# Altium PCB dc_cdi_cx500.PcbDoc (part 2 of 2)
Units mm, origin at the board's own origin, x right, y up, seen from the top; angles counter-clockwise.
Board outline 71.37 x 84.84 mm, 4 copper layers (Top, Power Plane, Ground Plane, Bottom), stack 1.586 mm thick; 162 components, 101 nets, 486 pads, 355 vias.
Unrouted connection lines stored in the file: 55.
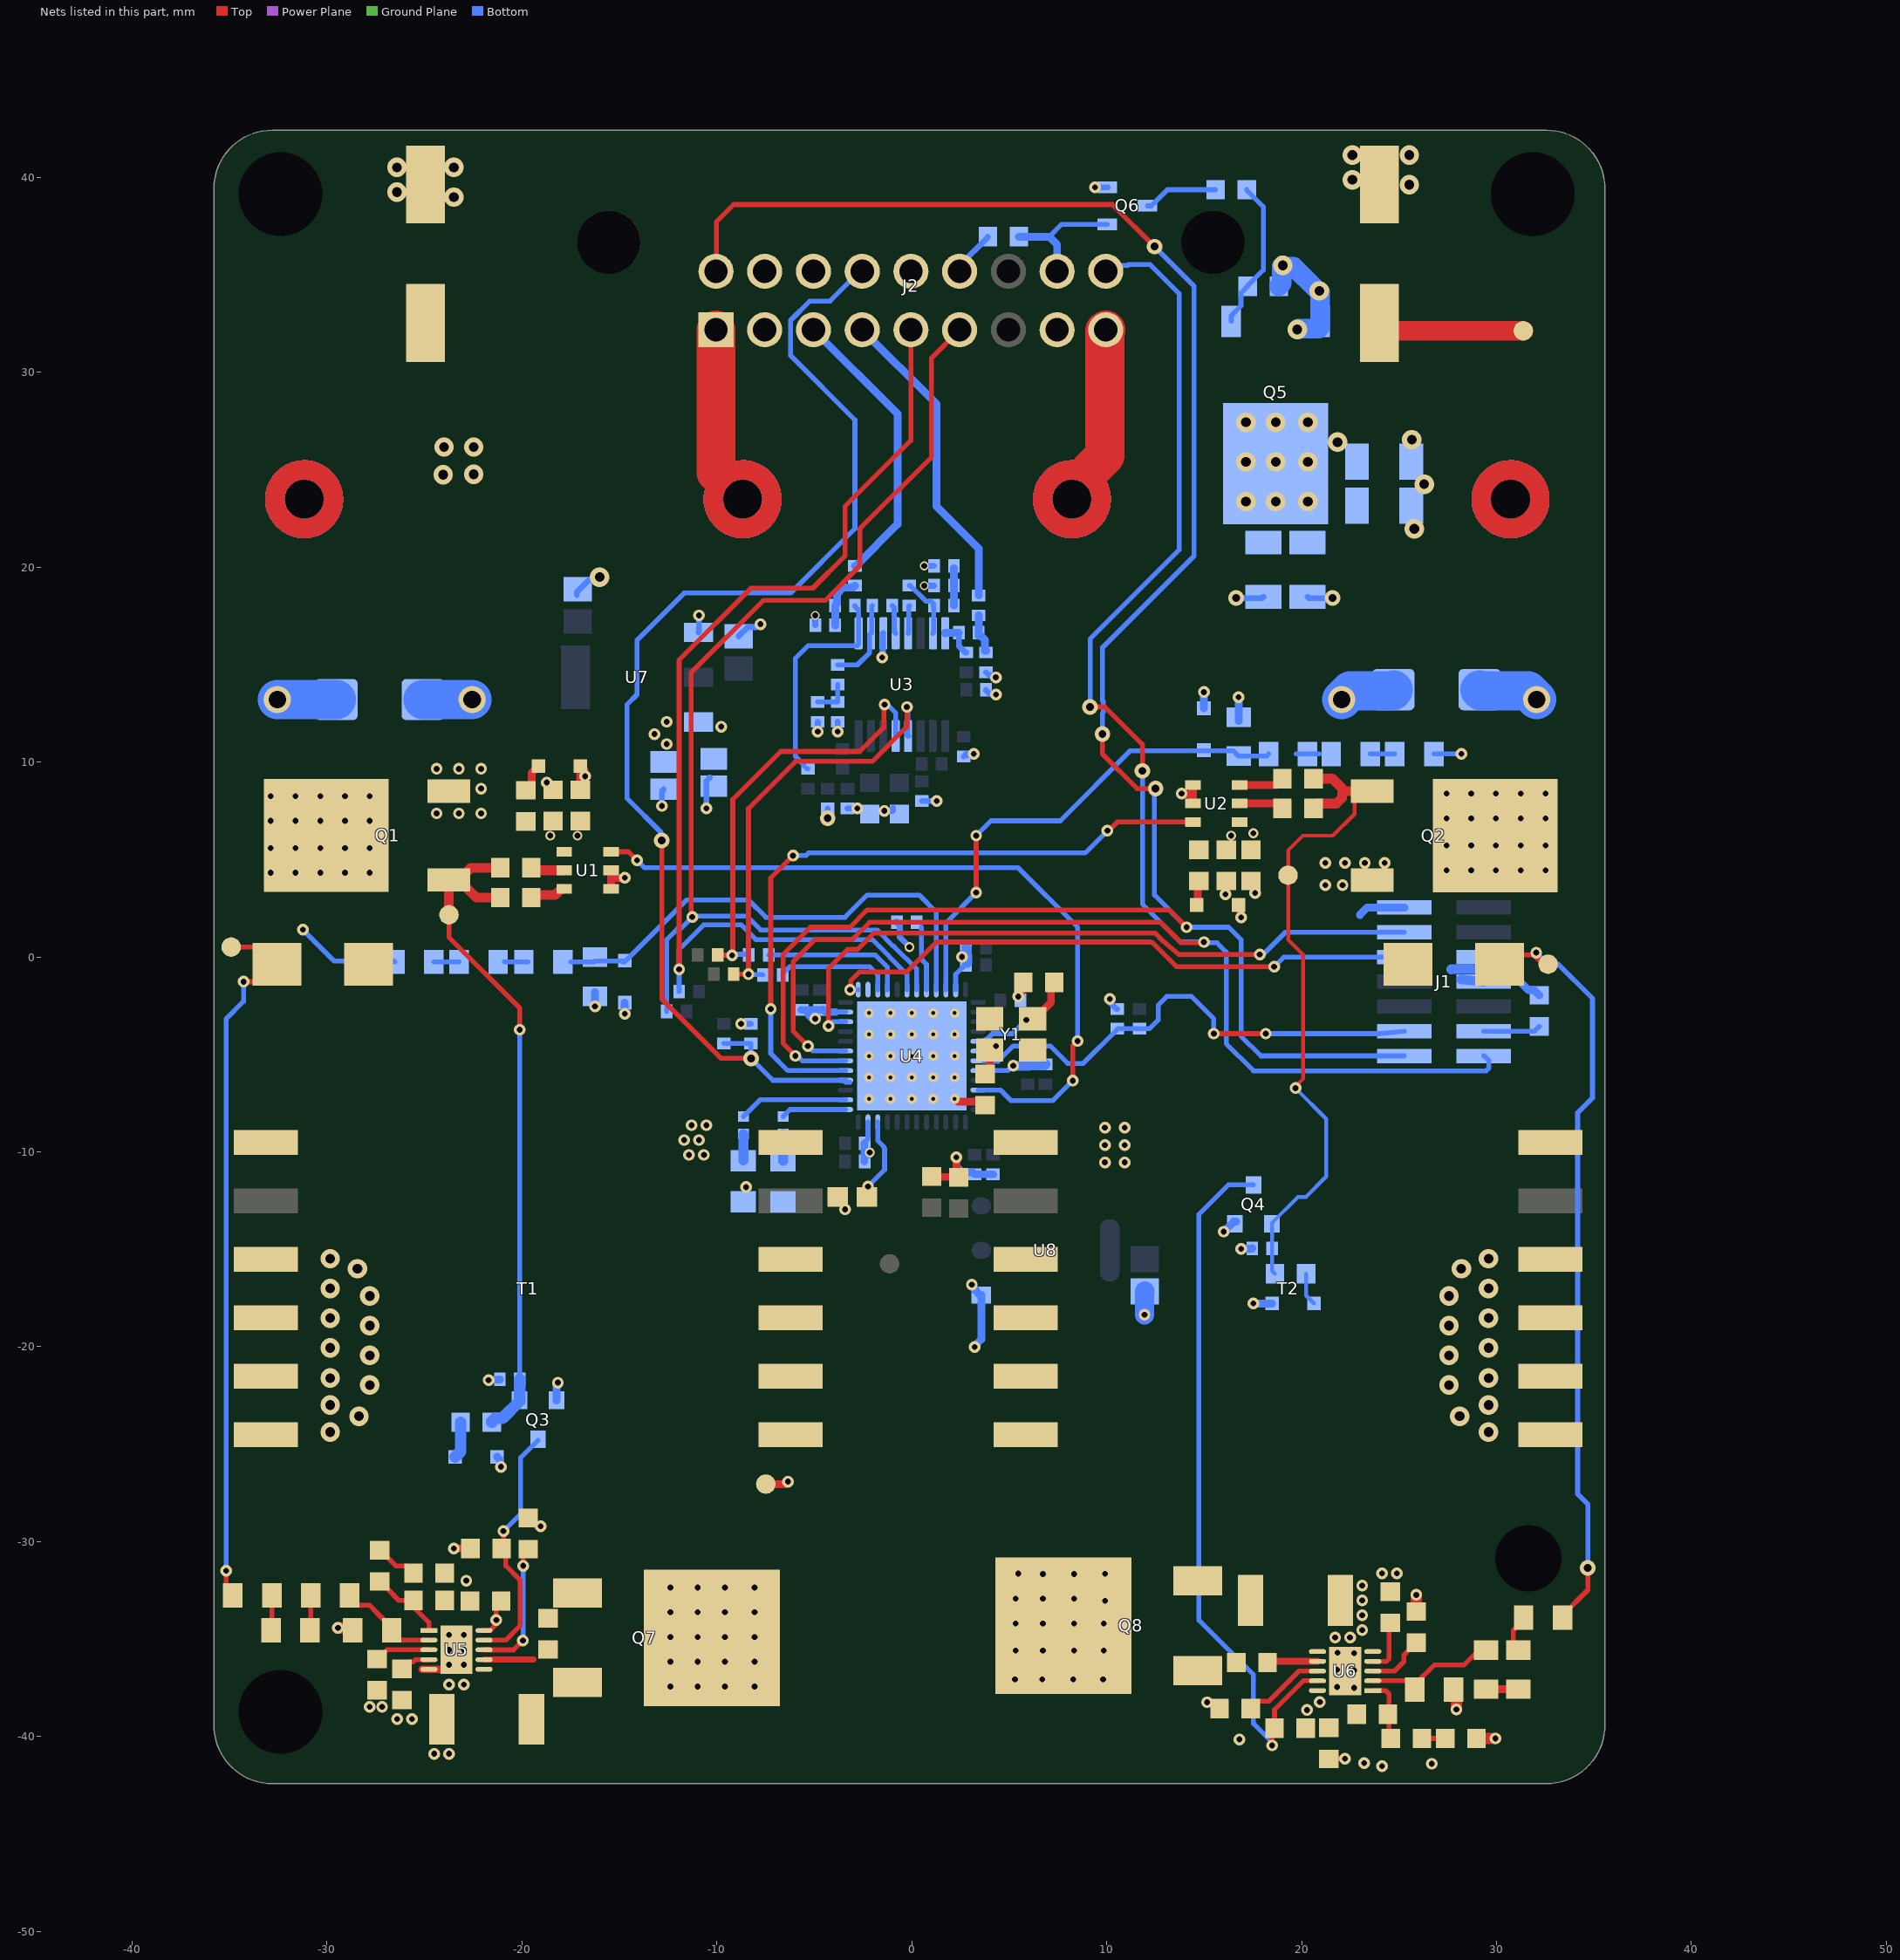
[diagram p4: the nets of this part, all layers, seen from the top]

## Via types
v1: diameter 0.6, hole 0.3, Top to Bottom, 251 vias
v2: diameter 1, hole 0.5, Top to Bottom, 57 vias
v3: diameter 0.5, hole 0.2, Top to Bottom, 25 vias
v4: diameter 0.8, hole 0.4, Top to Bottom, 11 vias
v5: diameter 0.5, hole 0.3, Top to Bottom, 7 vias
v6: diameter 0.45, hole 0.3, Top to Bottom, 3 vias
v7: diameter 0.55, hole 0.3, Top to Bottom, 1 vias

## Nets (pads, with @x,y where several pads share a name; then routed paths per layer and width w, separated by ;. In a path a pad name is that pad's centre, name@x,y a point inside that pad or via, vN(x,y) a via of type N, cw(c..) or ccw(c..) an arc to the next point about the centre after c; other vN are vias at no path point) (continued)
DGND: C22.1 C23.2 C24.2 C25.2 C26.2 C27.2 C28.2 C29.2 C30.2 C31.2 C32.2 C33.2 C34.2 C49.1 C50.2 C51.2 C54.2 C55.2 D3.1 D4.1 D9.2 D10.2 J1.2 J1.5 J1.7 pad.4@-7.493,-27.051 Q3.2 Q4.2 R7.2 R8.2 R29.2 R35.1 R39.2 RJ1.2 U4.8 U4.23 U4.35 U4.47 U4.49 U8.1 Y1.2 Y1.4 | length 41.8
  Top w0.4: pad.4@-7.493,-27.051 -6.531,-27.051 -6.404,-26.924 v1(-6.35,-26.924) ; C23.2@-3.798,-12.319 -3.473,-12.619 v1(-3.429,-12.954) ; C51.2@1.016,-11.265 1.039,-11.288 2.381,-11.288 C50.2@2.404,-11.311 2.286,-11.193 v1(2.286,-10.287) ; v3(2.2,-7.28) 2.227,-7.28 2.376,-7.429 C34.2@3.763,-7.429 ; Y1.4@3.996,-3.178 Y1.4@4.096,-3.178 ; v1(5.461,-2.032) ccw(c5.239,-1.699) 5.63,-1.781 cw(c6.556,-1.97) 5.719,-1.532 C33.2@5.887,-1.303
  Top w0.5: v1(5.201,-5.579) v1@5.22,-5.56 ; Y1.2@6.096,-4.778 Y1.2@6.196,-4.778
  Bottom w0.25: -3.91,-2.83 U4.35@-3.4,-2.83 ; C32.2@-2.46,-9.559 -2.265,-9.364 -2.265,-9.14 -2.234,-9.11 ; C32.2@-2.438,-9.585 C32.2@-2.412,-9.559 ; C31.2@-2.412,-10.494 C31.2@-2.386,-10.468 ; -2.25,-9.094 U4.23@-2.25,-8.48 ; U4.47@2.25,-1.68 2.25,-0.894 C28.2@2.843,-0.301 ; v1(2.575,0) 2.609,0.034 C29.2@2.609,0.263 ; U4.8@3.4,-5.83 4.846,-5.83 ccw(c4.846,-5.58) 5.023,-5.757 v1(5.201,-5.579)
  Bottom w0.3: v1(-8.763,-3.429) C54.2@-8.255,-3.429 ; R39.2@-0.799,1.815 -0.799,1.765 -0.612,1.578 -0.612,1.013 -0.127,0.528 v5(-0.127,0.508) ; v1(10.16,-2.159) 10.217,-2.216 10.217,-2.393 10.491,-2.667 C55.2@10.541,-2.667
  Bottom w0.4: v1(-21.717,-21.717) -21.696,-21.696 -21.158,-21.696 R7.2@-21.136,-21.674 ; D9.2@-21.277,-25.654 -21.127,-25.804 -21.127,-26.063 -21.082,-26.108 v1(-21.082,-26.162) ; Q3.2@-18.227,-22.749 -18.227,-21.91 v1(-18.161,-21.844) ; C25.2@-5.68,-2.717 C26.2@-4.713,-2.717 ; C26.2@-4.559,-2.71 -4.539,-2.71 -4.419,-2.83 -3.91,-2.83 ; C31.2@-2.438,-10.487 C32.2@-2.438,-9.585 ; v1(2.286,-10.287) 2.286,-10.74 2.602,-11.056 3.124,-11.056 C22.1@3.224,-11.156 R35.1@4.166,-11.156 ; v1(3.079,-16.822) 3.079,-16.876 3.261,-17.057 3.261,-17.112 U8.1@3.497,-17.348 ; v1(3.224,-20.018) 3.224,-19.964 3.563,-19.624 3.563,-17.414 U8.1@3.497,-17.348 ; U8.1@3.563,-17.348 U8.1@3.497,-17.348 ; v1(16.002,-14.097) 16.512,-13.587 Q4.2@16.64,-13.587 ; v1(16.891,-14.986) 16.905,-14.972 17.452,-14.972 R8.2@17.467,-14.957 ; v1(17.526,-17.78) D10.2@18.483,-17.78 ; 22.987,2.159 23.368,2.54 J1.2@25.27,2.54 ; J1.7@29.34,-1.27 31.203,-1.27 31.626,-1.693 31.92,-1.693 R29.2@32.195,-1.968
  Bottom w0.5: v5@-2.384,-10.09 -2.216,-10.09 v5(-2.159,-10.033) ; C29.2@2.784,0.488 2.834,0.438 2.834,0.071 2.843,0.061 C28.2@2.843,-0.301 ; v1@5.233,-5.592 6.008,-5.592 6.033,-5.567 6.808,-5.567 C27.2@6.858,-5.517 ; 27.686,-0.635 28.844,-0.628 ccw(c28.841,-0.128) 29.341,-0.126 29.341,-0.12 J1.5@29.34,0 ; J1.7@28.195,-1.15 J1.7@29.34,-1.27
  Bottom w0.6: -5.222,-2.908 v1(-4.958,-3.172)
  Bottom w1: v1(11.938,-18.36) 11.938,-17.174 C49.1@11.955,-17.157
  other v1: 16.807,-40.15 -8.509,-11.811
  other v3: -2.2,-7.28 -1.1,-7.28 0,-7.28 1.1,-7.28 -2.2,-6.18 -1.1,-6.18 0,-6.18 1.1,-6.18 2.2,-6.18 -2.2,-5.08 -1.1,-5.08 0,-5.08 1.1,-5.08 2.2,-5.08 -2.2,-3.98 -1.1,-3.98 0,-3.98 1.1,-3.98 2.2,-3.98 -2.2,-2.88 -1.1,-2.88 0,-2.88 1.1,-2.88 2.2,-2.88
EXT_SENSOR1_I2C_SCL: J2.5 R36.2 U4.42 | length 55.8
  Top w0.25: v1(-11.938,-0.635) -11.938,15.24 -8.255,18.923 -5.08,18.923 -3.429,20.574 -3.429,23.114 -0.047,26.496 J2.5@-0.047,32.179
  Bottom w0.25: R36.2@-11.938,-1.778 v1(-11.938,-0.635) -11.938,0.381 -10.668,1.651 -8.763,1.651 -8.001,0.889 -2.028,0.889 -0.25,-0.889 U4.42@-0.25,-1.68
EXT_SENSOR1_I2C_SDA: J2.6 R34.2 U4.43 | length 57
  Top w0.25: v1(-11.264,2.047) -11.328,2.111 -11.328,14.58 -7.62,18.288 -4.445,18.288 -2.667,20.066 -2.667,21.971 1.016,25.654 1.016,30.742 J2.6@2.453,32.179
  Bottom w0.25: R34.2@-12.573,-2.794 -12.573,0.889 -12.027,1.435 -11.877,1.435 v1(-11.264,2.047) ; v1@-11.339,2.123 -11.318,2.101 -8.481,2.101 -7.762,1.382 -1.782,1.382 -0.944,0.544 -0.925,0.544 0.25,-0.631 U4.43@0.25,-1.68
EXT_SENSOR3_SPI_NSS: U4.38
FLYBACK_EN_L: Q3.3 R43.1 U5.9 | length 12.8
  Top w0.25: U5.9@-21.949,-35.055 -20.831,-35.055 -20.104,-34.328 -20.104,-31.966 -20.828,-31.242 -20.828,-30.569 R43.1@-21.044,-30.353 -20.955,-29.978 v1(-20.955,-29.464)
  Bottom w0.25: v1(-20.955,-29.464) -20.066,-28.575 -20.066,-25.688 Q3.3@-19.177,-24.799
FLYBACK_EN_R: Q4.3 R56.2 U6.9 | length 36.9
  Top w0.25: v1(18.489,-40.458) 18.489,-39.701 R56.2@18.608,-39.582 18.608,-38.625 20.088,-37.145 U6.9@20.818,-37.145
  Bottom w0.25: Q4.3@17.526,-11.7 16.24,-11.7 14.732,-13.208 14.732,-34.036 17.526,-36.83 17.526,-39.342 18.422,-40.237 18.422,-40.391 v1(18.489,-40.458)
GND: C7.2 C8.2 C9.2 C10.2 C11.2 C12.2 C13.2 C14.2 C15.2 C16.1 C17.1 C18.2 C19.2 C20.2 C21.2 C47.2 C48.2 C52.2 C53.2 J2.2 J2.8 J2.14 J2.15 NT1.2 NT2.2 NT3.2 NT4.2 Q6.2 R10.2 R25.2 R26.2 R27.2 R32.1 RJ1.1 U3.11 U7.1 | length 20.3
  Bottom w0.3: C53.2@-17.192,18.577 -17.192,18.712 -16.567,19.337 -16.356,19.337 -16.206,19.487 v2(-16.017,19.487) ; v1(-12.827,7.747) -12.827,8.502 C48.2@-12.728,8.601 ; U7.1@-10.947,16.65 -10.922,16.675 v1(-10.922,17.526) ; v1(-10.541,7.62) -10.541,9.034 C47.2@-10.369,9.205 ; C52.2@-8.89,16.447 -8.413,16.924 -7.993,16.924 -7.843,17.074 v1(-7.762,17.074) ; C15.2@-4.953,17.018 v6(-4.953,17.526) ; v1(-4.826,11.557) R27.2@-4.826,12.065 ; v4(-4.318,7.112) C13.2@-4.318,7.62 ; v1(-3.81,11.557) C14.2@-3.81,12.065 ; R26.2@-3.302,7.62 v1(-2.794,7.62) ; v1(-1.524,15.367) -1.492,15.399 -1.492,16.593 U3.11@-1.46,16.625 ; v1(-1.407,7.496) -0.985,7.496 -0.96,7.521 C10.2@-0.96,7.653 ; R25.2@0.508,8.001 v1(1.27,8.001) ; v6(0.635,19.05) R10.2@1.143,19.05 ; v6(0.635,20.066) C9.2@1.143,20.066 ; J2.15@2.453,35.179 2.453,35.486 3.899,36.932 R32.1@3.899,36.957 ; C8.2@2.667,10.287 2.817,10.437 2.817,10.407 2.867,10.357 3.118,10.357 v1(3.175,10.414) ; C11.2@3.81,13.716 3.81,13.669 3.96,13.519 4.261,13.519 v1(4.318,13.462) ; C7.2@3.81,14.605 3.96,14.455 4.119,14.455 4.23,14.344 v1(4.311,14.344) ; v1(9.398,39.497) 9.401,39.494 10.031,39.494 Q6.2@10.033,39.492 ; v4(16.637,18.415) 17.981,18.415 C20.2@18.047,18.481 ; C21.2@20.307,18.481 20.372,18.415 v4(21.59,18.415)
  other v2: 25.781,21.971 26.289,24.257 25.654,26.543 -23.495,38.989 -26.416,39.243 25.527,39.624 22.606,39.878 -26.416,40.513 -23.495,40.513 22.606,41.148 25.527,41.148
HSE_OSC_IN: C33.1 U4.5 Y1.3 | length 5.3
  Top w0.25: Y1.3@6.196,-3.178 Y1.3@6.296,-3.178
  Top w0.4: Y1.3@6.296,-3.178 7.139,-2.335 C33.1@7.139,-1.303
  Bottom w0.25: U4.5@3.4,-4.33 3.675,-4.33 3.775,-4.23 3.847,-4.23 4.14,-3.937 5.165,-3.937 v1(5.873,-3.229)
HSE_OSC_OUT: C34.1 U4.6 Y1.1 | length 2.4
  Top w0.25: C34.1@3.763,-6.003 C34.1@3.996,-5.77
  Top w0.35: C34.1@3.996,-5.77 Y1.1@3.996,-4.778
  Bottom w0.25: U4.6@3.4,-4.83 4.136,-4.83 4.264,-4.702 ccw(c4.134,-4.572) v1(4.318,-4.572)
IGNT_TRIG_L: U1.6 U4.10 | length 39
  Top w0.25: U1.6@-15.437,5.395 -14.54,5.395 -14.098,4.953 v1(-14.097,4.953) ; v1(8.255,-6.35) 8.255,-4.572 v1(8.509,-4.318)
  Bottom w0.25: v1(-14.097,4.953) -13.716,4.572 5.461,4.572 8.509,1.524 v1(8.509,-4.318) ; U4.10@3.4,-6.83 4.544,-6.83 5.08,-7.366 7.239,-7.366 v1(8.255,-6.35)
IGNT_TRIG_R: U2.6 U4.29 | length 36.1
  Top w0.25: v1(-7.239,-2.667) -7.239,4.054 v1(-6.096,5.197) ; v1(10.033,6.477) 10.094,6.477 10.541,6.924 U2.6@14.421,6.924
  Bottom w0.25: v1(-7.239,-2.667) -7.239,-4.953 -6.362,-5.83 U4.29@-3.4,-5.83 ; v1(-6.096,5.197) -6.084,5.209 -5.421,5.209 -5.296,5.334 8.89,5.334 v1(10.033,6.477)
IN1+: R12.2 R20.2 U3.16 | length 1.9
  Bottom w0.3: R12.2@2.413,16.637 2.413,15.952 2.744,15.621 R20.2@2.794,15.621
  Bottom w0.4: U3.16@1.714,16.605 1.714,16.632 1.72,16.637 R12.2@2.413,16.637
IN1-: R16.2 R19.2 U3.15 | length 3.1
  Bottom w0.25: U3.15@1.079,16.605 1.111,16.637 R16.2@1.111,18.002
  Bottom w0.254: R19.2@-0.127,19.05 -0.077,19.05 0.716,18.257 0.97,18.257 1.111,18.116 R16.2@1.111,18.002
IN2+: R18.2 R23.2 U3.9 | length 11.6
  Bottom w0.25: R18.2@-5.334,9.652 -5.384,9.652 -5.559,9.827 -5.559,9.877 -5.969,10.287 -5.969,15.326 -5.334,15.961 -2.81,15.961 -2.73,16.041 U3.9@-2.73,16.605 -2.73,17.793 -2.921,17.984 R23.2@-2.921,18.034
IN2-: R17.2 R24.2 U3.10 | length 4.4
  Bottom w0.254: R24.2@-3.81,14.986 -2.794,14.986 -2.174,15.606 -2.174,16.527 U3.10@-2.095,16.605 -2.06,16.641 -2.06,17.992 R17.2@-2.024,18.028
KILL_SWITCH: C54.1 J2.13 R68.1 U4.28 | length 63.2
  Top w0.25: v4(-12.827,5.969) -12.827,-2.159 -9.779,-5.207 v4(-8.255,-5.207)
  Bottom w0.25: v4(-12.827,5.969) -12.867,6.009 -12.867,6.39 -14.605,8.128 -14.605,12.954 -14.097,13.462 -14.097,16.256 -11.684,18.669 -6.223,18.669 -2.921,21.971 -2.921,27.559 -6.222,30.86 -6.222,32.666 -5.233,33.655 -4.191,33.655 -2.667,35.179 J2.13@-2.547,35.179 ; R68.1@-9.652,-4.445 C54.1@-8.255,-4.445 v4(-8.255,-5.207) -7.132,-6.33 U4.28@-3.4,-6.33 ; U4.28@-3.4,-6.43 U4.28@-3.175,-6.43
L_COIL: C1.1 J2.1 | length 9.3
  Top w2: J2.1@-10.047,32.179 -10.047,24.853 C1.1@-8.679,23.485
L_COIL_MOSFET_GATE: pad.5@-23.749,2.159 Q1.1 Q3.1 R2.1 R3.1 R7.1 R66.1 | length 34.9
  Top w0.254: pad.5@-23.749,2.413 -23.749,1.016 -20.12,-2.613 v1@-20.12,-3.61
  Top w0.5: pad.5@-23.749,2.413 Q1.1@-23.749,3.949 ; R3.1@-21.12,3.048 -22.348,3.048 -23.249,3.949 -22.626,4.572 R2.1@-21.12,4.572
  Bottom w0.254: R7.1@-20.12,-21.674 v1(-20.12,-3.737)
  Bottom w0.6: R66.1@-21.552,-23.876 -21.552,-23.851 -21.377,-23.676 -21.004,-23.676 -20.127,-22.799 Q3.1@-20.127,-22.749 -20.127,-21.731 -20.12,-21.724 R7.1@-20.12,-21.674
L_HV: C1.2 C37.2 D5.1 D11.1 pad.4@-34.925,0.508 Q1.4 R40.2 R41.2 | length 45.5
  Top w0.254: v1(-35.179,-31.496) -35.179,-32.268 -34.928,-32.268 -34.557,-32.639 R40.2@-34.464,-32.639 ; pad.4@-34.925,0.508 -33.465,0.508 D5.1@-32.576,-0.381 -33.465,-1.27 v1(-34.29,-1.27)
  Bottom w0.254: v1(-35.179,-31.496) -35.179,-3.175 -34.29,-2.286 v1(-34.29,-1.27) ; v1(-31.242,1.397) -29.637,-0.208 -26.573,-0.208 R41.2@-26.527,-0.254
  Bottom w2: C37.2@-32.559,13.208 D11.1@-29.52,13.208
  other v1: -32.893,4.318 -31.623,4.318 -30.353,4.318 -29.083,4.318 -27.813,4.318 -32.893,5.588 -31.623,5.588 -30.353,5.588 -29.083,5.588 -27.813,5.588 -32.893,6.985 -31.623,6.985 -30.353,6.985 -29.083,6.985 -27.813,6.985 -32.893,8.255 -31.623,8.255 -30.353,8.255 -29.083,8.255 -27.813,8.255
L_HV_FB: R46.1 R50.2 U5.2 | length 5.1
  Top w0.25: R46.1@-28.845,-32.766 -28.845,-32.891 -28.47,-33.266 -28.345,-33.266 -28.337,-33.274 -27.813,-33.274 -27.437,-33.65 -27.437,-33.668 -26.686,-34.419 R50.2@-26.686,-34.544 ; R50.2@-26.686,-34.669 -26.3,-35.055 U5.2@-24.78,-35.055
LED1: R38.1 U4.25 | length 3.4
  Bottom w0.254: R38.1@-6.604,-8.186 -6.248,-7.83 U4.25@-3.4,-7.83
LED2: R37.1 U4.26 | length 5.6
  Bottom w0.254: R37.1@-8.636,-8.186 -7.78,-7.33 U4.26@-3.4,-7.33
LEFT_PULSE_3V3: R13.1 U4.39 | length 6
  Bottom w0.25: R13.1@-6.627,-0.92 -6.627,-0.87 -6.266,-0.508 -2.159,-0.508 -1.75,-0.917 U4.39@-1.75,-1.68
LEFT_PULSE_P: J2.4 R9.2 | length 16.1
  Bottom w0.4: J2.4@-2.547,32.179 1.27,28.362 1.27,23.114 3.429,20.955 R9.2@3.429,18.542
NetC23_1: C23.1 U4.22 | length 4.5
  Top w0.25: v1(-2.251,-11.776) -2.251,-11.782 -2.413,-11.944 C23.1@-2.181,-12.319
  Bottom w0.25: v1(-2.251,-11.776) -1.397,-10.922 -1.397,-9.883 ccw(c-1.647,-9.883) -1.47,-9.706 -1.75,-9.426 U4.22@-1.75,-8.48
NetC35_2: C35.2 U5.8 | length 7
  Top w0.254: U5.8@-21.949,-35.555 -21.946,-35.557 -20.438,-35.557 v1(-19.955,-35.075) ; v1(-19.939,-31.242) -19.939,-30.645 C35.2@-19.685,-30.391
  Bottom w0.254: v1@-19.947,-35.067 -19.947,-31.25 v1(-19.939,-31.242)
NetC38_2: C38.2 U5.3 | length 2.8
  Top w0.25: C38.2@-27.432,-36.03 -27.407,-36.03 -26.932,-35.555 U5.3@-24.78,-35.555
NetC39_2: C39.2 R52.2 U5.1 | length 4
  Top w0.254: R52.2@-27.305,-32.042 -27.28,-32.042 -26.573,-32.749 -26.573,-32.774 -26.327,-33.02 C39.2@-25.565,-33.02 ; C39.2@-25.819,-33.109 -24.78,-34.148 U5.1@-24.78,-34.555
NetC40_2: C40.2 R52.1 | length 2.2
  Top w0.25: R52.1@-27.305,-30.442 -27.28,-30.442 -26.474,-31.248 -25.915,-31.248 -25.565,-31.598 C40.2@-25.565,-31.623
NetC41_2: C41.2 U6.8 | length 4.2
  Top w0.25: C41.2@17.386,-38.564 17.386,-38.539 17.736,-38.189 18.326,-38.189 19.87,-36.645 U6.8@20.818,-36.645
NetC44_1: C44.1 U6.3 | length 3.1
  Top w0.25: U6.3@23.649,-36.645 24.767,-36.645 25.246,-36.166 25.246,-35.823 25.506,-35.563 25.506,-35.538 25.856,-35.188 C44.1@25.881,-35.188
NetC45_1: C45.1 R65.1 U6.1 | length 3.2
  Top w0.254: U6.1@23.649,-37.645 23.655,-37.651 24.318,-37.651 24.484,-37.817 24.484,-38.845 24.484,-40.014 R65.1@24.573,-40.103
NetC46_1: C46.1 R65.2 | length 1.2
  Top w0.254: R65.2@26.173,-40.103 C46.1@27.367,-40.103
NetD1_1: D1.1 R1.1 | length 1.3
  Top w0.4: D1.1@14.614,2.667 14.673,2.726 14.673,3.84 R1.1@14.732,3.899
NetD2_1: D2.1 R4.1 | length 1.5
  Top w0.4: R4.1@-19.812,8.547 -19.787,8.547 -19.512,8.822 -19.512,9.435 D2.1@-19.151,9.796
NetD3_2: D3.2 R37.2 | length 1.4
  Bottom w0.5: D3.2@-8.636,-10.437 R37.2@-8.636,-9.086
NetD4_2: D4.2 R38.2 | length 1.4
  Bottom w0.5: D4.2@-6.604,-10.459 R38.2@-6.604,-9.086
NetD5_2: D5.2 T1.P$1
NetD6_1: D6.1 R47.1 R51.2 U4.45 | length 25.3
  Bottom w0.25: R47.1@-17.488,-0.254 R51.2@-16.294,-0.254 ; R51.2@-16.256,-0.216 -14.798,-0.216 ccw(c-14.798,0.034) -14.621,-0.143 -11.557,2.921 -8.382,2.921 -7.493,2.032 -3.429,2.032 -2.286,3.175 0.381,3.175 1.25,2.306 U4.45@1.25,-1.68 ; D6.1@-14.832,-0.26 D6.1@-14.732,-0.26
NetD7_2: D7.2 T2.P$12
NetD8_1: D8.1 R60.1 R64.2 U4.46 | length 25.4
  Top w0.25: v1(3.302,3.302) v1(3.302,6.223)
  Bottom w0.25: U4.46@1.75,-1.68 1.75,1.75 v1(3.302,3.302) ; v1(3.302,6.223) 4.064,6.985 7.62,6.985 11.214,10.579 14.986,10.579 15.289,10.579 16.488,10.579 R64.2@16.764,10.303 ; R64.2@16.828,10.303 18.193,10.303 R60.1@18.304,10.414
NetD9_1: D9.1 R66.2 | length 1.9
  Bottom w0.6: D9.1@-23.427,-25.654 -23.152,-25.379 R66.2@-23.152,-23.876
NetD10_1: D10.1 R67.2 | length 1.7
  Bottom w0.2: R67.2@20.231,-16.256 20.231,-17.378 D10.1@20.633,-17.78
NetJ1_11: J1.11 R29.1 | length 3
  Bottom w0.25: J1.11@29.34,-3.81 31.953,-3.81 R29.1@32.195,-3.568
NetQ5_1: Q5.1 R30.1 R31.2 | length 7.8
  Bottom w0.254: Q5.1@16.389,32.613 16.389,32.913 16.886,33.41 16.886,34.069 R30.1@17.234,34.417 17.234,34.442 18.034,35.242 18.034,38.494 17.183,39.345 R31.2@17.183,39.37
NetQ6_3: Q6.3 R31.1 | length 3.8
  Bottom w0.254: Q6.3@12.083,38.542 12.283,38.542 13.111,39.37 R31.1@15.583,39.37
NetQ7_1: Q7.1 R42.2
NetQ7_3: Q7.3 R49.2 U5.6
NetQ7_4: Q7.4 T1.P$7 T1.P$8 T1.P$9 T1.P$10
  other v1: -12.383,-37.435 -10.986,-37.435 -9.589,-37.435 -8.065,-37.435 -12.383,-36.165 -10.986,-36.165 -9.589,-36.165 -8.065,-36.165 -12.383,-34.895 -10.986,-34.895 -9.589,-34.895 -8.065,-34.895 -12.383,-33.625 -10.986,-33.625 -9.589,-33.625 -8.065,-33.625 -12.387,-32.36 -10.99,-32.36 -9.593,-32.36 -8.069,-32.36
NetQ8_1: Q8.1 R55.2
NetQ8_3: Q8.3 R61.2 U6.6
NetQ8_4: Q8.4 T2.P$3 T2.P$4 T2.P$5 T2.P$6
  other v1: 5.289,-37.065 6.686,-37.065 8.286,-37.065 9.81,-37.065 5.328,-35.598 6.725,-35.598 8.325,-35.598 9.849,-35.598 5.328,-34.201 6.725,-34.201 8.325,-34.201 9.849,-34.201 9.908,-33.047 5.328,-32.931 6.725,-32.931 8.325,-32.931 5.454,-31.64 6.725,-31.661 8.325,-31.661 9.908,-31.65
NetR2_2: R2.2 U1.2 | length 1.7
  Top w0.5: R2.2@-19.52,4.572 -19.393,4.445 U1.2@-17.837,4.445
NetR3_2: R3.2 U1.3 | length 1.9
  Top w0.5: R3.2@-19.52,3.048 -19.393,3.175 -18.307,3.175 -17.987,3.495 U1.3@-17.837,3.495
NetR5_2: R5.2 U2.2 | length 2.3
  Top w0.4: U2.2@16.821,7.874 18.758,7.874 R5.2@19.012,7.62
NetR6_2: R6.2 U2.3 | length 2.3
  Top w0.4: U2.3@16.821,8.824 18.717,8.824 19.012,9.119 R6.2@19.012,9.144
NetR11_2: R11.2 R13.2 U3.4 | length 22.4
  Top w0.25: R11.2@-9.144,-0.889 v1(-8.382,-0.889) -8.382,7.62 -5.969,10.033 -2.032,10.033 -0.254,11.811 v1(-0.254,12.827)
  Bottom w0.25: v1(-8.382,-0.889) -8.367,-0.904 -7.658,-0.904 R13.2@-7.643,-0.92
  Bottom w0.3: v1(-0.254,12.827) -0.222,12.795 -0.222,11.367 U3.4@-0.191,11.335
NetR14_2: R14.2 R15.2 U3.5 | length 21.8
  Top w0.25: R15.2@-9.966,0.099 -9.959,0.092 -9.225,0.092 v1(-9.218,0.085) -9.188,0.115 -9.188,8.084 -6.731,10.541 -2.667,10.541 -1.437,11.771 -1.437,12.914 v1(-1.397,12.954)
  Bottom w0.25: v1(-9.218,0.085) -9.166,0.136 R14.2@-8.58,0.136 ; v1(-1.397,12.954) -1.33,12.887 -1.198,12.887 -0.826,12.515 U3.5@-0.826,11.335
NetR39_1: R39.1 U4.44 | length 3.3
  Bottom w0.25: 0.495,-0.119 R39.1@0.495,1.524
  Bottom w0.254: 0.495,-0.119 0.75,-0.374 U4.44@0.75,-1.68
NetR40_1: R40.1 R44.2 | length 1.9
  Top w0.254: R44.2@-32.877,-34.925 R44.2@-32.837,-34.885 ; R44.2@-32.837,-34.631 R40.1@-32.837,-32.766
NetR41_1: R41.1 R45.2 | length 1.3
  Bottom w0.254: R41.1@-24.527,-0.254 R45.2@-23.225,-0.254
NetR42_1: R42.1 U5.7 | length 2.6
  Top w0.3: U5.7@-21.949,-36.055 -19.403,-36.055
  Top w0.5: R42.1@-18.685,-35.337 R42.1@-18.66,-35.337
NetR44_1: R44.1 R46.2 | length 1.8
  Top w0.25: R44.1@-30.877,-34.544 -30.845,-34.512 R46.2@-30.845,-32.766
NetR45_1: R45.1 R47.2 | length 1.2
  Bottom w0.25: R45.1@-20.901,-0.254 R47.2@-19.707,-0.254
NetR48_2: R48.2 U5.4 | length 1.6
  Top w0.25: R48.2@-26.161,-36.53 -25.811,-36.18 -25.598,-36.18 -25.473,-36.055 U5.4@-24.78,-36.055
NetR53_1: R53.1 R57.2 | length 1.9
  Top w0.25: R57.2@30.861,-35.576 30.861,-34.558 31.385,-34.034 R53.1@31.385,-33.909
NetR54_1: R54.1 R58.2 | length 1.3
  Bottom w0.25: R58.2@23.517,10.414 R54.1@24.781,10.414
NetR55_1: R55.1 U6.7 | length 2.6
  Top w0.25: R55.1@18.25,-36.209 R55.1@18.314,-36.145
  Top w0.35: R55.1@18.314,-36.145 U6.7@20.818,-36.145
NetR57_1: R57.1 R59.2 | length 1.7
  Top w0.4: R59.2@29.21,-37.576 R57.1@30.861,-37.576
NetR58_1: R58.1 R60.2 | length 1.2
  Bottom w0.254: 19.723,10.414 20.917,10.414
NetR62_1: R62.1 U6.4 | length 2.6
  Top w0.25: U6.4@23.649,-36.145 24.344,-36.145 24.491,-35.999 24.491,-35.363 24.484,-35.356 R62.1@24.484,-34.345
NRST: C55.1 J1.12 R69.1 U4.7 | length 25.4
  Top w0.25: v1(15.494,-3.937) v1(18.161,-3.937)
  Bottom w0.25: U4.7@3.699,-5.352 4.427,-5.352 5.207,-4.572 7.112,-4.572 7.784,-5.244 8.001,-5.461 8.794,-5.461 10.572,-3.683 12.192,-3.683 12.636,-3.238 12.636,-2.476 13.081,-2.032 14.351,-2.032 15.494,-3.175 v1(15.494,-3.937) ; v1(18.161,-3.937) 24,-3.937 J1.12@25.27,-3.81
OUT1: R19.1 U3.13 | length 1.5
  Bottom w0.254: U3.13@-0.191,16.605 -0.159,16.637 -0.159,18.002 R19.1@-0.127,18.034
OUT2: R17.1 U3.12 | length 1.5
  Bottom w0.254: R17.1@-1.008,18.028 -0.908,17.928 -0.908,17.447 -0.904,17.442 -0.904,16.683 U3.12@-0.826,16.605
PGND: C2.2 C3.2 C4.2 C5.2 C35.1 C36.2 C37.1 C38.1 C39.1 C40.1 C41.1 C42.1 C43.2 C44.2 C45.2 C46.2 D1.2 D2.2 D6.2 D8.2 D11.2 D12.2 NT1.1 NT2.1 NT3.1 NT4.1 Q1.3 Q2.3 R48.1 R49.1 R50.1 R51.1 R61.1 R62.2 R63.1 R64.1 T1.P$12 T2.P$1 U1.4 U1.5 U2.4 U2.5 U5.5 U5.11 U6.5 U6.11 | length 22.2
  Top w0.25: C43.2@21.396,-41.157 21.771,-41.148 v1(22.225,-41.148)
  Top w0.4: U5.5@-25.125,-36.555 -23.983,-36.555 v1(-23.745,-36.317) ; C35.1@-19.685,-28.791 -19.385,-29.066 v1(-19.05,-29.21) ; C2.2@-18.409,8.569 C2.2@-18.334,8.644 ; v1@-17.015,9.395 -17.015,8.572 C3.2@-17.012,8.569 ; D2.2@-17.001,9.796 -16.802,9.597 -16.802,9.309 v1(-16.764,9.271) ; U1.4@-15.437,3.495 -15.437,3.97 ; U1.5@-15.437,4.445 -15.437,3.97 ; v1(-14.732,4.064) -14.77,4.026 -15.381,4.026 -15.437,3.97 ; v1(13.843,8.382) 13.881,8.344 14.332,8.344 14.421,8.255 ; U2.4@14.371,8.874 U2.4@14.421,8.824 14.421,8.255 ; U2.5@14.421,7.874 14.421,8.255 ; v1(16.092,3.212) 16.11,3.231 16.11,3.624 16.129,3.643 C4.2@16.129,3.899 ; D1.2@16.764,2.667 16.853,2.578 16.853,2.07 v1(16.891,2.032) ; C5.2@17.399,3.899 17.399,3.798 17.573,3.624 17.573,3.323 v1(17.611,3.284)
  Top w0.6: v1(-29.443,-34.431) -28.627,-34.431 R50.1@-28.486,-34.29 ; C44.2@25.881,-33.588 v1(25.881,-32.737) ; v1(27.94,-38.608) R63.1@27.94,-38.062 ; C46.2@28.967,-40.103 v1(29.945,-40.103)
  Bottom w0.4: v1(-16.256,-2.54) -16.256,-2.091 R51.1@-16.25,-1.807 ; v1(-14.732,-2.921) D6.2@-14.732,-2.345 ; D8.2@14.986,12.759 v1(14.986,13.589) ; R64.1@16.764,12.103 v1(16.764,13.335)
  Bottom w2: D11.2@-25.09,13.208 C37.1@-22.559,13.208 ; C42.1@22.055,13.208 22.503,13.656 24.649,13.656 D12.2@24.709,13.716
  other v1: 24.13,-41.529 26.67,-41.402 23.214,-41.373 -24.507,-40.889 -23.745,-40.889 -26.412,-39.111 -25.65,-39.111 -27.813,-38.481 -27.178,-38.481 15.156,-38.245 22.695,-37.503 21.819,-37.464 -23.745,-37.333 -22.983,-37.333 22.695,-36.614 21.819,-36.575 -22.983,-36.317 21.848,-35.704 22.695,-35.725 -23.745,-35.555 -22.983,-35.555 21.721,-34.92 22.483,-34.92 -23.745,-34.793 -22.983,-34.793 23.109,-34.54 23.109,-33.778 23.109,-33.016 23.109,-32.254 -22.86,-32.004 24.126,-31.628 24.888,-31.628 9.906,-10.541 10.922,-10.541 -11.43,-10.16 -10.668,-10.16 9.906,-9.652 10.922,-9.652 -11.684,-9.398 -10.922,-9.398 9.906,-8.763 10.922,-8.763 -11.303,-8.636 -10.541,-8.636 21.209,3.683 22.098,3.683 21.209,4.826 22.225,4.826 23.241,4.826 24.257,4.826 -24.384,7.366 -23.241,7.366 -22.098,7.366 -22.098,8.636 -18.728,8.951 -24.384,9.652 -23.241,9.652 -22.098,9.652
POWER_ON: J2.17 Q6.1 R32.2 | length 6.7
  Bottom w0.254: 7.052,36.957 7.687,37.592 Q6.1@10.033,37.592
  Bottom w0.4: R32.2@5.499,36.957 7.052,36.957 7.453,36.556 J2.17@7.453,35.179
R_COIL: C6.1 J2.9 | length 9.4
  Top w2: C6.1@8.217,23.485 8.217,24.026 9.906,25.715 9.906,32.132 J2.9@9.953,32.179
R_COIL_MOSFET_GATE: pad.5@19.304,4.191 Q2.1 Q4.1 R5.1 R6.1 R8.1 R67.1 | length 35.2
  Top w0.2: v1(19.685,-6.731) 19.685,-6.644 20.066,-6.263 20.066,0.127 19.304,0.889 pad.5@19.304,4.191 19.304,5.461 20.066,6.223 21.6,6.223 22.711,7.335 22.711,8.003 Q2.1@23.211,8.503
  Top w0.5: R5.1@20.612,7.62 20.612,7.645 20.837,7.87 21.789,7.87 22.081,8.163 22.081,8.653 21.59,9.144 R6.1@20.612,9.144 ; 22.081,8.503 23.211,8.503 Q2.1@23.622,8.503
  Bottom w0.2: Q4.1@18.476,-13.7 18.476,-14.95 R8.1@18.483,-14.957 18.483,-16.108 R67.1@18.631,-16.256 ; Q4.1@18.476,-13.65 19.815,-12.311 20.223,-12.311 21.262,-11.272 21.262,-8.308 v1(19.685,-6.731)
R_HV: C6.2 C42.2 D7.1 D12.1 pad.4@32.645,-0.374 Q2.4 R53.2 R54.2 | length 45.8
  Top w0.254: D7.1@30.164,-0.381 D7.1@30.314,-0.381 ; D7.1@31.287,-1.354 D7.1@30.314,-0.381 ; v1(32.035,0.223) v1@31.914,0.102 ; pad.4@32.645,-0.374 32.397,-0.381 v1@31.914,0.102 ; R53.2@33.385,-33.909 33.385,-33.784 34.685,-32.484 v4(34.685,-31.344) ; D7.1@30.314,-0.381 30.797,0.102 v1@31.914,0.102
  Bottom w0.254: R54.2@26.781,10.414 v1(28.194,10.414) v1@28.194,10.508 ; v1(32.035,0.223) 32.624,-0.366 33.162,-0.366 34.925,-2.129 34.925,-7.239 34.163,-8.001 34.163,-27.559 34.685,-28.081 v4(34.685,-31.344)
  Bottom w2: D12.1@29.139,13.716 29.199,13.656 31.607,13.656 C42.2@32.055,13.208
  other v1: 27.432,4.445 28.702,4.445 29.972,4.445 31.242,4.445 32.512,4.445 27.432,5.715 28.702,5.715 29.972,5.715 31.242,5.715 32.512,5.715 27.432,7.112 28.702,7.112 29.972,7.112 31.242,7.112 32.512,7.112 27.432,8.382 28.702,8.382 29.972,8.382 31.242,8.382 32.512,8.382
R_HV_FB: R59.1 R63.2 U6.2 | length 6.6
  Top w0.25: U6.2@23.649,-37.145 25.422,-37.145 25.797,-37.52 R63.2@25.797,-37.592 ; R63.2@25.733,-37.404 26.815,-36.322 28.339,-36.322 29.085,-35.576 R59.1@29.21,-35.576
RIGHT_PULSE_3V3: R14.1 U4.40 | length 7.5
  Bottom w0.25: R14.1@-7.346,0.099 -1.877,0.099 -1.25,-0.528 U4.40@-1.25,-1.68
RIGHT_PULSE_P: J2.3 R28.2 | length 14.8
  Bottom w0.4: J2.3@-5.047,32.179 -0.733,27.865 -0.733,22.204 -2.871,20.066 R28.2@-2.921,20.066
SWCLK: J1.6 U4.37 | length 31
  Top w0.25: v1(-3.166,-1.687) -3.137,-1.658 -3.137,-1.232 -2.667,-0.762 -0.254,-0.762 1.27,0.762 12.215,0.762 ; v1(18.589,-0.508) 13.589,-0.508 12.392,0.689 ; 12.215,0.762 cw(c12.215,0.512) 12.392,0.689 ; 12.215,0.762 cw(c12.215,0.512) 12.392,0.689
  Bottom w0.25: v1(-3.166,-1.687) U4.37@-2.75,-1.68 ; v1(18.589,-0.508) 19.097,0 J1.6@25.27,0
SWDIO: J1.4 U4.34 | length 35.1
  Top w0.25: v1(-4.279,-3.549) -4.279,-0.596 -3.302,0.381 -2.794,0.381 -1.945,1.23 12.476,1.23 12.891,0.815 13.698,0.127 13.802,0.127 v1(17.851,0.127)
  Bottom w0.25: v1(-4.279,-3.549) -4.06,-3.33 U4.34@-3.4,-3.33 ; v1(17.851,0.127) 17.918,0.194 18.101,0.194 19.177,1.27 J1.4@25.27,1.27
UART_DEBUG_RX: J1.13 J2.18 U4.31 | length 93.2
  Top w0.25: v1(-5.334,-4.572) -6.096,-3.81 -6.096,-0.254 -4.953,0.889 -3.048,0.889 -2.159,1.778 12.765,1.778 13.812,0.731 14.955,0.731 v1(14.986,0.762) ; v4(9.144,12.827) 9.906,12.827 11.833,10.9 v4(11.833,9.547)
  Bottom w0.25: v1(-5.334,-4.572) -5.076,-4.83 U4.31@-3.4,-4.83 ; v4(9.144,12.827) 9.144,16.314 13.716,20.886 13.716,34.036 12.226,35.526 11.131,35.526 11.081,35.476 10.25,35.476 J2.18@9.953,35.179 ; v4(11.833,9.547) 11.833,2.711 13.781,0.762 v1(14.986,0.762) 15.026,0.722 15.661,0.722 16.129,0.254 16.129,-4.445 17.526,-5.842 29.468,-5.842 29.614,-5.696 29.614,-5.325 29.369,-5.08 J1.13@29.34,-5.08
UART_DEBUG_TX: J1.14 J2.10 U4.30 | length 113.4
  Top w0.25: J2.10@-10.047,35.179 -10.033,35.193 -10.033,37.719 -9.144,38.608 10.287,38.608 v4(12.446,36.449) ; v1(-5.969,-5.08) -6.6,-4.449 -6.6,0.131 -5.207,1.524 -3.175,1.524 -2.286,2.413 13.208,2.413 v1(14.097,1.524) ; v4(9.779,11.43) 9.779,10.414 11.557,8.636 v4(12.508,8.636)
  Bottom w0.25: v1(-5.969,-5.08) -5.874,-5.08 -5.624,-5.33 U4.30@-3.4,-5.33 ; v4(9.779,11.43) 9.779,12.507 9.819,12.547 9.819,13.107 9.779,13.147 9.779,15.875 14.478,20.574 14.478,34.417 v4(12.446,36.449) ; v4(12.508,8.636) 12.446,8.574 12.446,3.175 v1(14.097,1.524) 16.256,1.524 16.891,0.889 16.891,-4.064 17.907,-5.08 J1.14@25.27,-5.08
VBAT: C2.1 C3.1 C4.1 C5.1 C16.2 C17.2 C18.1 C19.1 C20.1 C21.1 C36.1 C43.1 C47.1 C48.1 pad.4@31.369,32.131 Q5.3 R1.2 R4.2 R43.2 R56.1 T1.P$3 T1.P$4 T1.P$5 T1.P$6 T2.P$7 T2.P$8 T2.P$9 T2.P$10 U1.1 U2.1 U5.10 U6.10 U7.3 | length 10.4
  Top w0.25: U5.10@-21.949,-34.555 -21.637,-34.555 -21.222,-34.14 v1@-21.222,-34.022 ; v1(-21.32,-34.022) -21.32,-33.43 C36.1@-21.155,-33.055
  Top w0.4: v1(-23.495,-30.353) R43.2@-22.644,-30.353
  Top w1: C17.2@23.994,32.535 24.398,32.131 pad.4@31.369,32.131
  other v1: 20.277,-38.644 20.933,-38.228 -12.573,10.922 -13.208,11.435 -9.779,11.816 -12.573,12.065
  other v2: -29.845,-24.384 29.591,-24.384 -28.366,-23.568 28.112,-23.568 -29.845,-22.991 29.591,-22.991 -27.813,-21.971 27.559,-21.971 -29.845,-21.61 29.591,-21.61 -27.813,-20.447 27.559,-20.447 -29.845,-20.059 29.591,-20.059 -27.813,-18.923 27.559,-18.923 -29.845,-18.535 29.591,-18.535 -27.813,-17.399 27.559,-17.399 -29.845,-17.011 29.591,-17.011 -28.448,-16.002 28.194,-16.002 -29.845,-15.487 29.591,-15.487 17.145,23.368 18.669,23.368 20.32,23.368 -24.048,24.745 -22.479,24.765 17.145,25.4 18.669,25.4 20.32,25.4 -24.003,26.162 -22.479,26.162 21.844,26.416 17.145,27.432 18.669,27.432 20.32,27.432
  other v5: -18.55,6.22 -17.153,6.22 16.383,6.223 17.526,6.35
VBAT_0: J2.11 J2.12 Q5.2 R30.2 | length 6.4
  Bottom w1: R30.2@18.834,34.417 18.981,34.564 18.981,35.429 v2(19.033,35.481) 19.085,35.429 19.58,35.429 20.835,34.174 v2(20.908,34.174) 20.949,34.133 Q5.2@20.949,32.613 ; v2(19.776,32.192) 19.828,32.244 20.88,32.244 Q5.2@20.949,32.313
VR_SENSOR_IN1+: C7.1 R9.1 R12.1 | length 2.2
  Bottom w0.4: R12.1@3.429,16.465 R9.1@3.429,17.526 ; R12.1@3.429,16.637 3.429,16.587 3.743,16.273 3.743,15.721 3.752,15.712 C7.1@3.81,15.712
VR_SENSOR_IN1-: C9.1 R10.1 R16.1 | length 1.8
  Bottom w0.4: R16.1@2.159,18.034 R10.1@2.159,18.923 ; R10.1@2.159,19.05 C9.1@2.159,19.939
VR_SENSOR_IN2+: C15.1 R23.1 R28.1 | length 2.8
  Bottom w0.4: C15.1@-3.937,17.018 R23.1@-3.937,18.034 -3.837,18.134 -3.837,18.642 -3.529,18.95 -3.021,18.95 R28.1@-2.921,19.05
VR_SENSOR_IN2-: C14.1 R24.1 R27.1 | length 1.9
  Bottom w0.25: R27.1@-4.826,13.081 C14.1@-3.81,13.081 R24.1@-3.81,13.97
pads on no net: J1.1 J1.8 J1.9 J1.10 J2. T1.P$2 T1.P$11 T2.P$2 T2.P$11 U3.2 U3.7 U4.2 U4.3 U4.4 U4.11 U4.13 U4.15 U4.18 U4.19 U4.20 U4.21 U4.27 U4.32 U4.33 U4.41

## Polygon pours and split planes (outlines as drawn)
PGND on Top "DGND_PLANE" (solid, pour order 77): -35.941,42.418 -35.941,-42.418 35.559,-42.418 35.559,42.418
NetQ7_4 on Top "DRAIN_L" (solid, pour order 73): -4.445,-27.432 -6.921,-29.909 -6.921,-37.401 -8.001,-38.481 -12.319,-38.481 -13.716,-37.084 -13.716,-27.552 -10.16,-23.368 -10.16,-16.764 -8.255,-14.859 -4.572,-14.859 -4.572,-15.24 -4.445,-15.367
PGND on Top "PGND_TOP" (solid, pour order 83): -21.463,-41.275 -20.447,-40.259 -17.526,-40.259 -17.526,-41.783 -18.161,-42.418 -21.463,-42.418
NetQ8_4 on Top "DRAIN_R" (solid, pour order 74): 3.937,-27.178 4.251,-27.492 4.251,-35.747 6.204,-37.7 10.317,-37.7 11.176,-37.175 11.176,-24.638 9.652,-23.114 9.652,-16.51 7.747,-14.605 4.064,-14.605 4.064,-14.986 3.937,-15.113
VBAT on Power Plane "VBAT_POUR" (solid, pour order 76): -42.245,28.829 -42.245,-42.418 44.75,-42.418 44.75,28.829
5V0 on Power Plane "5v0_plane" (solid, pour order 75): -19.321,15.748 -19.321,13.064 -18.431,12.175 -14.986,12.175 -13.286,13.413 -5.041,13.285 -3.937,12.175 3.175,12.175 4.699,10.541 4.699,2.667 6.173,1.193 6.173,-10.491 4.699,-11.965 2.856,-11.965 2.571,-12.25 2.571,-12.923 2.856,-13.208 5.715,-13.208 7.747,-11.176 7.747,1.857 6.604,3.515 6.604,13.82 3.97,16.454 -18.431,16.454
VBAT_0 on Power Plane "VBAT_0_POUR" (solid, pour order 79): -42.672,41.148 44.704,41.148 44.704,30.734 -42.799,30.734
PGND on Ground Plane "PGND_R" (solid, pour order 82): 15.641,7.62 14.732,6.681 14.732,-27.432 12.573,-29.591 12.573,-48.514 39.901,-48.514 39.703,5.001 37.084,7.62
DGND on Ground Plane "GND_00" (solid, pour order 81): -11.357,6.604 -13.97,3.991 -13.97,1.016 -13.97,-26.289 -10.414,-29.845 10.414,-29.845 13.335,-26.924 13.335,1.27 13.335,2.667 9.398,6.604
GND on Ground Plane "GND_00" (solid, pour order 80): -37.211,35.179 -16.51,35.179 -16.51,5.08 -15.875,4.445 -14.732,4.445 -11.684,7.493 10.089,7.493 13.589,3.985 13.589,8.763 36.703,8.763 36.703,35.106 36.703,46.101 -37.211,46.101
PGND on Ground Plane "PGND_L" (solid, pour order 85): -40.645,-34.798 -40.645,-47.62 -29.591,-47.62 -23.876,-47.62 -13.34,-47.62 -13.34,-41.788 -13.34,-29.464 -15.24,-27.564 -15.24,1.524 -17.78,4.064 -17.78,34.036 -36.481,34.036 -40.645,29.27
PGND on Ground Plane "PGND_BOT" (solid, pour order 84): -14.605,-30.699 13.589,-30.699 13.589,-45.593 -14.605,-45.593
DGND on Bottom "bot-GND_PLANE" (solid, pour order 78): -36.016,43.576 35.497,43.576 35.497,-43.673 -36.219,-43.673

## Keep-outs
Keep-Out Layer:
  region: -11.557,33.909 -12.446,33.02 -12.446,21.336 -11.176,20.066 -6.35,20.066 -6.35,20.193 -5.207,21.336 -5.207,27.559 -8.636,30.988 -8.636,33.909
  region: 11.43,34.163 12.319,33.274 12.319,21.59 11.049,20.32 6.223,20.32 6.223,20.447 5.08,21.59 5.08,27.813 8.509,31.242 8.509,34.163

## Other copper
Top:
  region net NetR42_1: -20.092,-36.094 -19.024,-35.026 -18.135,-35.026 -18.135,-35.788 -18.333,-35.986 -18.841,-35.986 -19.239,-36.185
  region net NetQ7_1: -19.177,-34.417 -19.177,-32.639 -18.415,-31.877 -16.002,-31.877 -16.002,-33.274 -17.145,-34.417
  region net NetQ8_3: 17.526,-31.242 18.542,-32.258 18.542,-32.639 20.544,-34.641 20.671,-34.641 21.209,-35.179 21.209,-35.761 19.251,-35.761 17.907,-34.417 13.843,-34.417 13.335,-33.909 13.335,-31.242
  region net GND: -27.051,41.275 -27.051,38.862 -26.416,38.227 -23.241,38.227 -22.733,38.735 -22.733,41.275
  region net GND: 21.971,41.91 21.971,39.497 22.606,38.862 25.781,38.862 26.289,39.37 26.289,41.91
  region net VBAT: -20.193,6.477 -19.304,6.477 -18.394,5.207 -17.399,5.207 -16.51,6.096 -16.51,7.366 -20.193,7.366
  region net VBAT: 14.224,5.969 14.605,6.35 15.983,6.35 16.383,7.112 17.526,7.112 17.907,6.731 17.907,5.08 14.224,5.08
  region net VBAT: 25.019,34.061 25.019,28.321 23.495,26.797 23.495,23.241 21.971,21.717 16.637,21.717 16.002,22.352 16.002,28.321 18.288,30.607 21.209,30.607 22.479,31.877 22.479,34.163 22.86,34.544 24.617,34.544
  region net VBAT: -25.908,34.671 -25.908,29.102 -25.019,28.213 -25.019,24.511 -24.003,23.495 -22.479,23.495 -21.463,24.511 -21.463,31.242 -22.987,32.766 -22.987,34.544 -25.781,34.544
  region net PGND: 11.557,-8.636 11.557,-10.668 11.165,-11.06 4.368,-11.06 4.114,-10.806 4.114,-8.52 4.495,-8.139 11.06,-8.139
  region net PGND: -12.192,-8.636 -12.192,-10.16 -11.557,-10.795 -4.318,-10.795 -4.064,-10.541 -4.064,-8.255 -4.445,-7.874 -11.43,-7.874
  region net VBAT: 34.925,-14.859 34.925,-25.4 28.321,-25.4 26.289,-23.368 26.289,-16.764 28.448,-14.605 34.671,-14.605
  region net VBAT: 19.812,-40.132 21.717,-40.132 21.844,-40.005 21.844,-38.989 21.463,-38.989 21.209,-38.735 21.209,-37.719 21.082,-37.592 20.32,-37.592 19.812,-38.1 19.812,-40.005
  region net VBAT: -22.352,-34.544 -21.717,-33.909 -21.717,-32.639 -21.59,-32.512 -20.701,-32.512 -20.574,-32.639 -20.574,-33.909 -21.336,-34.671 -22.225,-34.671
  region net VBAT: -35.179,-14.859 -35.179,-25.4 -28.575,-25.4 -26.543,-23.368 -26.543,-16.764 -28.702,-14.605 -34.925,-14.605
  region net NetQ7_3: -22.225,-36.449 -16.256,-36.449 -16.002,-36.703 -16.002,-38.735 -17.653,-40.386 -20.701,-40.386 -21.717,-39.37 -21.717,-37.465 -22.225,-36.957
  region net R_HV: 28.448,25.019 28.448,12.192 26.035,9.779 26.035,3.302 28.448,0.889 28.448,-1.27 29.083,-1.905 31.877,-1.905 33.02,-0.762 33.02,2.921 33.401,3.302 33.401,25.448 32.56,26.162 29.591,26.162
  region net L_HV: -33.909,25.356 -33.909,-1.651 -31.623,-1.651 -30.607,-0.635 -30.607,1.778 -29.083,3.302 -26.67,3.302 -26.162,3.81 -26.162,9.017 -28.575,11.43 -28.575,24.981 -29.658,26.416 -32.689,26.416
  region net DGND: 5.537,-4.242 5.334,-4.445 5.334,-4.953 4.826,-5.461 4.826,-5.842 4.953,-5.969 6.223,-5.969 6.858,-5.334 6.604,-4.953
  region net DGND: 3.302,-2.54 4.191,-1.651 5.842,-1.651 5.842,-2.413 5.179,-2.413 4.191,-3.683 3.937,-3.683
  region net PGND: 24.892,5.334 20.574,5.334 20.574,3.175 24.892,3.175
  region net PGND: 21.463,-37.689 22.352,-39.197 22.352,-39.37 23.241,-39.37 23.341,-39.27 23.341,-38.579 23.087,-38.325 23.087,-35.775 23.622,-35.775 23.622,-31.75 21.463,-31.75
  region net PGND: -25.019,6.858 -21.59,6.858 -21.59,10.287 -25.019,10.287
  region net PGND: -24.511,-32.135 -24.511,-31.113 -23.489,-31.113 -23.103,-31.655 -22.098,-31.655 -22.098,-33.909 -22.548,-34.359 -22.548,-36.802 -24.197,-36.802 -24.197,-33.842 -24.511,-33.528
  region net NetQ8_1: 13.462,-35.941 13.716,-35.687 17.018,-35.687 17.145,-35.814 17.018,-35.941 17.018,-36.703 16.764,-36.703 16.129,-37.338 13.589,-37.338
  region net NetD7_2: 26.924,0.381 26.924,-3.175 31.877,-8.128 33.655,-8.128 34.417,-8.89 34.417,-10.668 27.94,-10.668 23.495,-6.223 23.495,0.127 24.257,0.889 26.797,0.889
  region net NetD5_2: -29.21,0.508 -29.337,0.381 -29.337,-2.54 -34.925,-8.128 -34.925,-10.414 -34.671,-10.668 -30.353,-10.668 -26.416,-6.731 -26.416,0.508
Ground Plane:
  region net GND: 0.109,7.709 -0.349,7.251 -0.952,7.251 -1.415,7.714 -1.415,8.055 0.109,8.055
  region net DGND: 0.127,6.569 -0.331,7.027 -0.934,7.027 -1.397,6.564 -1.397,6.223 0.127,6.223
Bottom:
  region net VBAT: -13.589,11.684 -12.573,12.7 -9.779,12.7 -9.244,12.165 -9.244,10.16 -11.176,10.16 -11.938,9.398 -13.462,9.398 -13.589,9.525
  region net VBAT: 23.495,26.416 22.352,27.559 16.002,27.559 16.002,21.336 16.764,20.574 22.733,20.574 23.495,21.336
  region net 3V3: 2.626,-1.356 2.966,-1.016 3.175,-1.016 3.556,-0.635 3.556,1.016 4.191,1.016 4.572,0.635 4.572,-0.254 4.699,-0.381 4.699,-1.27 3.937,-2.032 2.794,-2.032
  region net 3V3: 3.048,-1.778 3.048,-2.032 3.048,-2.413 3.81,-2.413 4.064,-2.159 4.064,-1.778

## Silkscreen, mask and mechanical layers (free items; w line width, h text height)
Top Overlay:
  drawing of 425 lines, arcs and shapes, not listed
  text "VBAT_TP" at 30.999,36.868 h1.1 r270
  text "<- TOOLING_HOLE_2" at -34.735,31.902 h1 r90
  text "high performance" at -13.998,13.932 h2.5
  text "rev2.0" at 5.448,9.364 h2.5
  text "DC-CDI" at -16.076,9.354 h7.5
  text "FULLY PROGRAMMABLE" at -14.207,7.078 h3
  text "R_GATE_TP" at 19.072,3.716 h1 r270
  text "L_GATE_TP" at -23.517,-3.335 h1 r90
  text "HV_r_TP" at 34.268,-3.843 h1 r90
  text "HV_L_TP" at -34.82,-3.97 h1 r90
  text "3V3_TP" at -0.486,-17.014 h1 r270
  text "TOOLING_HOLE_1 ->" at 34.058,-27.44 h1 r270
  text "DGND_TP" at -8.669,-28.486 h1
Bottom Overlay:
  drawing of 411 lines, arcs and shapes, not listed
  text "warning! / high  / voltage" at 7.008,37.211 h2
  text "@andrealanzolla" at -34.887,14.817 h1.1 r270
  text "DEBUG" at 30.673,-7.223 h2
Mechanical 1:
  lines w0.1: -35.871,-39.418 ccw(c-32.871,-39.418) -32.871,-42.418 32.63,-42.418 ccw(c32.63,-39.418) 35.63,-39.418 35.63,39.418 ccw(c32.63,39.418) 32.63,42.418 -32.871,42.418 ccw(c-32.871,39.418) -35.871,39.418 -35.871,-39.418

## Text inside footprints (layer, text, board x,y; h text height)
J2: Top 3D Body "PCB EDGE" at -19.547,42.429 h0.81 r180